# Altium PCB STM32WL_Relayout_RevA.PcbDoc (part 2 of 2)
Units mm, origin at the board's own origin, x right, y up, seen from the top; angles counter-clockwise.
Board outline 40.25 x 54.25 mm, 4 copper layers (Top Layer, Int1 (GND), Int2 (PWR), Bottom Layer), stack 1.535 mm thick; 114 components, 68 nets, 360 pads, 205 vias.
Unrouted connection lines stored in the file: 7.
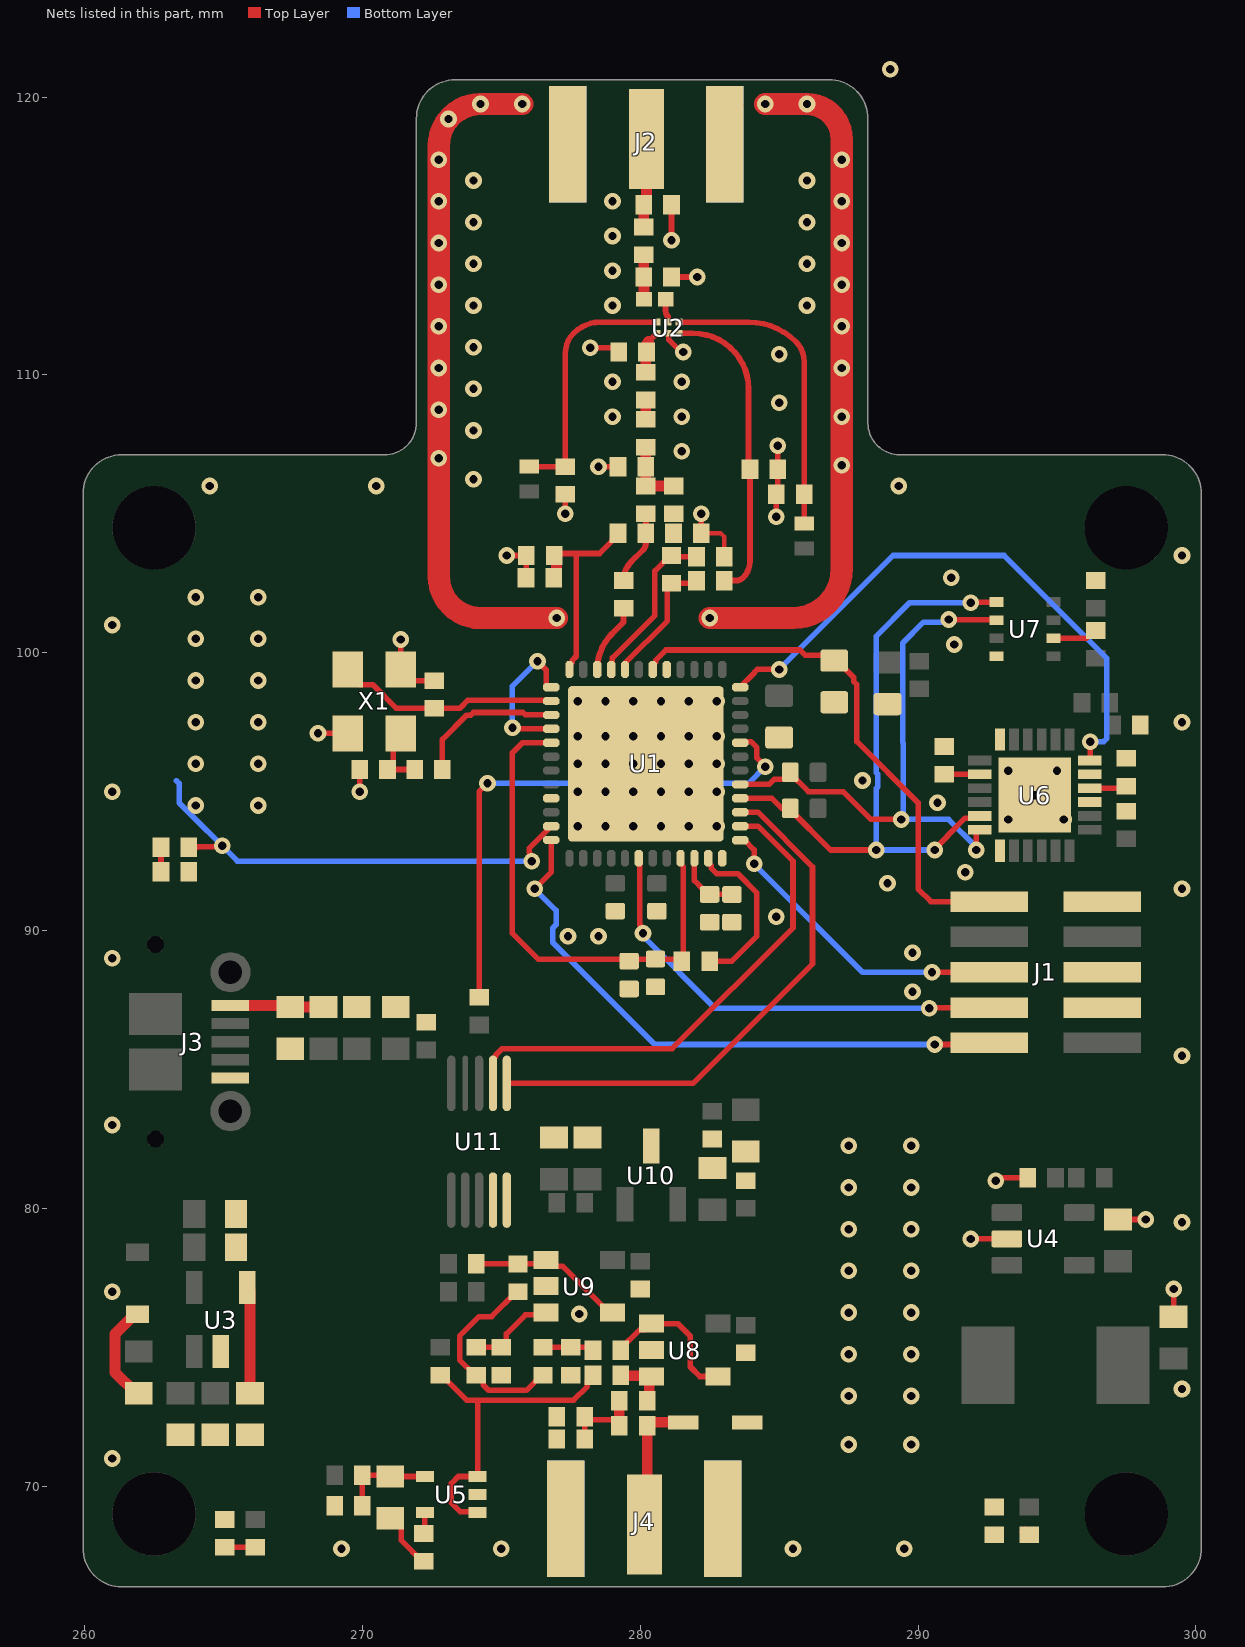
[diagram p4: the nets of this part, all layers, seen from the top]

## Via types
v1: diameter 0.6, hole 0.3, Top Layer to Bottom Layer, 205 vias

## Nets (pads, with @x,y where several pads share a name; then routed paths per layer and width w, separated by ;. In a path a pad name is that pad's centre, name@x,y a point inside that pad or via, vN(x,y) a via of type N, cw(c..) or ccw(c..) an arc to the next point about the centre after c; other vN are vias at no path point) (continued)
GND: C1.1 C2.1 C3.1 C5.1 C6.1 C7.1 C8.1 C9.1 C10.1 C11.1 C12.1 C13.1 C16.1 C17.1 C18.1 C20.1 C21.1 C23.1 C24.1 C25.1 C26.1 C27.1 C28.1 C29.1 C30.1 C31.1 C32.1 C33.1 C34.1 C35.1 C36.2 C37.1 C38.1 C39.1 C40.1 C41.1 C42.1 C43.1 C46.1 C47.2 C48.1 C49.1 C50.2 C52.1 C53.1 C54.1 C55.1 C56.1 C57.1 C58.1 C59.1 D5.1 J1.3 J1.5 J1.9 J2.2 J3.5 J4.2 R4.1 R5.1 R10.1 R12.1 R13.1 R15.1 R23.1 U1.48 U1.49 U2.2 U3.2 U4.2 U5.2 U6.1 U6.9 U6.11 U6.18 U6.25 U7.1 U7.7 U8.2 U9.2 U10.3 U11.4 U11.5 X1.2 X1.4 | length 83
  Top Layer w0.15: C16.1@282.2,104.3 282.9,104.3 282.962,104.238 283.025,104.175 C26.1@283.025,103.45
  Top Layer w0.2: v1(268.4,97.1) 268.402,97.098 X1.2@269.479,97.098 ; X1.2@269.1,96.719 X1.2@269.479,97.098 ; X1.2@269.2,97.376 X1.2@269.479,97.098 ; v1(269.9,95) 269.9,95.794 C21.1@269.904,95.798 ; C37.1@271,68.85 271.1,68.85 271.4,68.55 271.4,68.05 272.15,67.3 C36.2@272.2,67.3 ; v1@271.4,100.5 v1(271.379,100.479) X1.4@271.379,99.398 ; X1.4@271.781,99.8 X1.4@271.379,99.398 ; C20.1@272.676,98.9 C20.1@272.579,98.998 271.779,98.998 X1.4@271.379,99.398 ; v1(275.2,103.5) C11.1@275.9,103.5 275.9,102.709 C12.1@275.891,102.7 ; J2.2@276.825,116.675 277.4,117.25 J2.2@277.4,118.3 ; J2.2@276.825,119.4 277.4,118.825 J2.2@277.4,118.3 ; J2.2@276.925,117.825 J2.2@277.4,118.3 ; v1(277.3,105) C10.1@277.3,105.7 ; v1(278.2,110.975) 279.075,110.975 C18.1@279.225,110.825 ; v1(278.5,106.7) C17.1@279.2,106.7 ; U2.2@281,111.5 281.025,111.475 281.025,111.271 281.471,110.825 v1(281.55,110.825) ; C25.1@281.125,113.525 v1(282.05,113.525) ; v1(281.125,114.85) C24.1@281.125,116.125 ; C16.1@282.2,104.3 v1(282.2,105) ; J2.2@283.15,118.2 J2.2@283.05,118.3 ; J2.2@283.625,116.6 283.05,117.175 J2.2@283.05,118.3 ; J2.2@283.625,119.7 283.05,119.125 J2.2@283.05,118.3 ; v1(284.9,104.9) C13.1@284.9,105.7 284.95,105.75 C23.1@284.95,106.6 v1(284.95,107.45) ; v1(291.9,78.9) U4.2@293.2,78.9 ; v1(292.8,81) 292.9,81.1 R13.1@293.95,81.1 ; U7.7@294.875,100.525 296.075,100.525 296.35,100.8 C39.1@296.4,100.8 ; C34.1@297.2,79.6 v1(298.2,79.6) ; C35.1@299.2,76.1 v1(299.2,77.1)
  Top Layer w0.8: v1(275.75,119.75) v1(274.25,119.75) ccw(c274.25,118.25) 272.75,118.25 v1(272.75,117.75) v1(272.75,116.25) v1(272.75,114.75) v1(272.75,113.25) v1(272.75,111.75) v1(272.75,110.25) v1(272.75,108.75) v1(272.75,107) 272.75,102.75 ccw(c274.25,102.75) 274.25,101.25 v1(277,101.25) ; v1(282.5,101.25) 285.5,101.25 ccw(c285.5,103) 287.25,103 v1(287.25,106.75) v1(287.25,108.5) v1(287.25,110.25) v1(287.25,111.75) v1(287.25,113.25) v1(287.25,114.75) v1(287.25,116.25) v1(287.25,117.75) 287.25,118.5 ccw(c286,118.5) v1(286,119.75) v1(284.5,119.75)
  other v1: 269.25,67.75 275,67.75 285.5,67.75 289.5,67.75 261,71 287.5,71.5 289.75,71.5 287.5,73.25 289.75,73.25 299.5,73.5 287.5,74.75 289.75,74.75 277.8,76.2 287.5,76.25 289.75,76.25 261,77 287.5,77.75 289.75,77.75 287.5,79.25 289.75,79.25 299.5,79.5 299.5,79.5 287.5,80.75 289.75,80.75 287.5,82.25 289.75,82.25 261,83 299.5,85.5 289.8,87.8 261,89 289.8,89.2 277.4,89.8 278.5,89.8 284.9,90.5 299.5,91.5 288.9,91.7 291.7,92.1 277.75,93.75 278.75,93.75 279.75,93.75 280.75,93.75 281.75,93.75 282.75,93.75 293.25,94 295.25,94 266.25,94.5 290.7,94.6 294.2,94.875 261,95 277.75,95 278.75,95 279.75,95 280.75,95 281.75,95 282.75,95 288,95.4 293.25,95.75 295,95.75 264,96 266.25,96 277.75,96 278.75,96 279.75,96 280.75,96 281.75,96 282.75,96 277.75,97 278.75,97 279.75,97 280.75,97 281.75,97 282.75,97 264,97.5 266.25,97.5 299.5,97.5 299.5,97.5 277.75,98.25 278.75,98.25 279.75,98.25 280.75,98.25 281.75,98.25 282.75,98.25 264,99 266.25,99 291.3,100.3 264,100.5 266.25,100.5 261,101 264,102 266.25,102 291.2,102.7 299.5,103.5 264.5,106 270.5,106 289.3,106 274,106.25 281.5,107.25 274,108 279,108.5 281.5,108.5 285,109 274,109.5 279,109.75 281.5,109.75 285,110.75 274,111 274,112.5 279,112.5 286,112.5 279,113.75 274,114 286,114 279,115 274,115.5 286,115.5 279,116.25 274,117 286,117 273.101,119.214 289,121
IMU_CPOUT: C42.2 U6.20 | length 1.3
  Top Layer w0.2: C42.2@290.95,95.625 U6.20@292.225,95.625
IMU_INT: U1.12 U6.12 | length 20.9
  Top Layer w0.2: U1.12@283.598,98.761 284.1,99.262 284.1,99.283 284.217,99.4 v1(285,99.4) ; U6.12@296.175,96.125 296.2,96.15 v1(296.2,96.8)
  Bottom Layer w0.2: v1(285,99.4) 289.1,103.5 293.1,103.5 296.8,99.8 296.8,96.917 296.683,96.8 v1(296.2,96.8)
IMU_REGOUT: C40.2 U6.10 | length 1.4
  Top Layer w0.2: U6.10@296.175,95.125 297.425,95.125 C40.2@297.5,95.2
IN: D5.2 J4.1 R18.1 | length 5
  Top Layer w0.381: J4.1@280.15,68.625 280.25,68.725 R18.1@280.25,72.175 280.25,72.191 280.359,72.3 D5.2@281.55,72.3
IN_AA_Buf_IN: C48.2 R21.1 U9.3 | length 3.2
  Top Layer w0.2: R21.1@274.1,75 C48.2@275,75 275.183,75.183 275.183,75.483 275.867,76.167 276.517,76.167 U9.3@276.6,76.25
IN_AA_Buf_OUT: C44.1 R22.2 U9.1 U9.4 | length 5.7
  Top Layer w0.2: R22.2@274.1,78 C44.1@275.6,78 276.45,78 U9.1@276.6,78.15 276.825,77.925 277.2,77.925 278.875,76.25 U9.4@279,76.25
IN_Buf: C45.1 R17.1 U8.3 | length 1.9
  Top Layer w0.381: R17.1@279.3,74 279.325,73.975 280.225,73.975 280.325,73.875 280.325,73.15 C45.1@280.25,73.075
IN_RF: C45.2 C46.2 R18.2 R23.2 | length 3.4
  Top Layer w0.2: R23.2@278,71.7 C46.2@278,72.5 278.1,72.4 279.05,72.4 279.25,72.2 R18.2@279.25,72.175 ; C45.2@279.25,73.075 C45.2@279.35,72.975
  Top Layer w0.381: C46.2@278,72.5 C46.2@278.1,72.6 ; R18.2@279.25,72.175 C45.2@279.25,73.075
IP_Buf_Out: R19.2 U8.1 U8.4 | length 5.4
  Top Layer w0.2: R19.2@279.3,74.9 279.3,74.95 279.975,75.625 280.175,75.625 U8.1@280.4,75.85 281.35,75.85 281.8,75.4 281.8,74.3 282.15,73.95 U8.4@282.8,73.95
LDO_BYPASS: C33.2 U3.4 | length 3.8
  Top Layer w0.2: U3.4@265.85,77.15 U3.4@265.95,77.05
  Top Layer w0.4: C33.2@265.95,73.35 U3.4@265.95,77.05
LED_BUCK: D4.K R12.2 | length 0.2
  Top Layer w0.4: D4.K@293.85,68.35 293.95,68.25 D4.K@294,68.25
LED_LDO: D3.K R10.2 | length 1.1
  Top Layer w0.2: R10.2@265.05,67.8 D3.K@266.15,67.8
MCU_LED_A: D1.A U1.35 | length 17.3
  Top Layer w0.2: D1.A@263.75,93 264.05,93 264.075,93.025 264.925,93.025 v1(264.95,93.05) ; v1(276.1,92.5) 276.023,92.577 276.023,92.777 276,92.8 276,92.959 U1.35@276.802,93.761
  Bottom Layer w0.2: 263.3,95.4 263.4,95.3 263.4,94.6 265.5,92.5 v1(276.1,92.5)
  other v1: 264,94.5
MCU_LED_K: D1.K R5.2 | length 0.9
  Top Layer w0.2: R5.2@262.75,92.125 D1.K@262.75,93
MCU_PA: C11.2 C12.2 L2.2 U1.24 | length 8.7
  Top Layer w0.2: C11.2@276.9,103.5 277.091,103.309 277.091,102.9 C12.2@276.891,102.7 276.891,103.491 276.972,103.572 277.699,103.572 ; U1.24@277.452,99.399 277.452,99.565 277.552,99.665 277.552,99.727 277.699,99.874 277.699,103.572 ; L2.2@279.2,104.3 279,104.1 279,104.037 278.535,103.572 277.699,103.572
MCU_RF_OUT: L3.1 U1.22 | length 2.7
  Top Layer w0.214: U1.22@278.452,99.399 cw(c280.269,99.399) 278.984,100.684 279.4,101.1 L3.1@279.4,101.742
NetC6_2: C6.2 C7.2 U1.25 U1.28 U1.46 | length 7.5
  Top Layer w0.2: v1(275.4,97.3) 275.439,97.261 U1.28@276.802,97.261 ; v1(276.3,99.7) 276.618,99.382 276.618,98.811 276.668,98.761 U1.25@276.802,98.761 ; U1.46@281.952,92.601 281.952,91.8 C6.2@282.252,91.5 ; C6.2@282.4,91.3 C7.2@283.3,91.3
  Bottom Layer w0.2: v1(275.4,97.3) 275.4,98.8 v1(276.3,99.7)
NetC8_2: C8.2 C9.2 L1.1 U1.29 U1.45 | length 18
  Top Layer w0.2: U1.29@276.802,96.761 275.761,96.761 275.4,96.4 275.4,89.9 276.325,88.975 279.55,88.975 C9.2@280.55,88.975 281.425,88.975 L1.1@281.5,88.9 281.555,88.955 281.555,92.298
NetC10_2: C10.2 R6.2 U2.6 | length 9.3
  Top Layer w0.2: R6.2@276,106.7 C10.2@277.3,106.7 277.3,110.776 cw(c278.324,110.776) 277.6,111.5 cw(c278.566,110.534) 278.566,111.9 U2.6@280.6,111.9
NetC13_2: C13.2 R7.1 U2.4 | length 11
  Top Layer w0.2: U2.4@281.4,111.9 283.91,111.9 cw(c283.91,109.51) 285.6,111.2 cw(c284.876,110.476) 285.9,110.476 C13.2@285.9,105.7 R7.1@285.9,104.65
NetC14_1: C14.1 C16.2 L2.1 L3.2 L4.1 | length 2.7
  Top Layer w0.214: L3.2@279.4,102.6 cw(c280.366,102.6) 279.683,103.283 280.1,103.7 ccw(c279.859,103.941) 280.2,103.941 L2.1@280.2,104.3 L4.1@280.2,105
NetC14_2: C14.2 C15.1 C17.2 L4.2 | length 2.4
  Top Layer w0.39: C15.1@280.2,107.4 C17.2@280.2,106.7 L4.2@280.2,106 C14.2@281.2,106
NetC15_2: C15.2 L5.1 | length 0.7
  Top Layer w0.39: C15.2@280.2,108.4 L5.1@280.2,109.1
NetC18_2: C18.2 L5.2 U2.1 | length 1.6
  Top Layer w0.2: 280.3,111.2 U2.1@280.6,111.5
  Top Layer w0.39: L5.2@280.2,110.1 280.2,110.765 cw(c280.285,110.765) C18.2@280.225,110.825 280.225,111.019 cw(c280.481,111.019) 280.3,111.2
NetC19_2: C19.2 C23.2 U2.3 | length 11.2
  Top Layer w0.21: U2.3@281.4,111.5 281.9,111.5 cw(c281.9,109.5) 283.9,109.5 C23.2@283.9,106.6 ; C19.2@283.025,102.6 283.459,102.6 ccw(c283.459,102.941) 283.7,102.7 ccw(c283.096,103.304) 283.95,103.304 C23.2@283.95,106.6
NetC20_2: C20.2 U1.26 X1.1 | length 8.1
  Top Layer w0.2: X1.1@269.479,99.398 269.479,99.298 269.929,98.848 270.375,98.848 271.225,97.998 271.929,97.998 C20.2@272.579,97.998 273.503,97.998 273.799,98.294 276.768,98.294 U1.26@276.802,98.261
NetC21_2: C21.2 R8.1 X1.3 | length 2.5
  Top Layer w0.2: X1.3@271.379,97.098 271.104,96.823 271.104,95.998 C21.2@270.904,95.798 R8.1@271.879,95.798
NetC22_1: C22.1 C25.2 L7.2 | length 1.6
  Top Layer w0.39: L7.2@280.125,114.325 C25.2@280.125,113.525 cw(c280.101,113.501) 280.135,113.501 C22.1@280.135,112.725
NetC22_2: C22.2 U2.5 | length 0.8
  Top Layer w0.214: C22.2@280.915,112.725 280.915,112.305 ccw(c281.205,112.305) 281,112.1 U2.5@281,111.9
NetC24_2: C24.2 J2.1 L7.1 | length 3.3
  Top Layer w0.214: J2.1@280.125,118.4 J2.1@280.225,118.5
  Top Layer w0.39: L7.1@280.125,115.325 C24.2@280.125,116.125 ccw(c279.884,116.366) 280.225,116.366 J2.1@280.225,118.5
NetC36_1: C36.1 U5.5 | length 0.8
  Top Layer w0.2: C36.1@272.2,68.3 272.25,68.35 U5.5@272.25,69.05
NetC49_2: C49.2 R19.1 R20.2 | length 1.8
  Top Layer w0.2: R20.2@276.5,75 278.2,75 R19.1@278.3,74.9
NetD2_K: D2.K R9.1 | length 3.6
  Top Layer w0.4: D2.K@261.9,76.185 261.785,76.07 261.685,76.07 261.1,75.485 261.1,74.1 261.85,73.35 R9.1@261.95,73.35
NetL1_2: L1.2 U1.47 | length 6
  Top Layer w0.2: U1.47@282.452,92.601 282.452,92.435 282.552,92.335 282.552,92.248 282.75,92.05 283.51,92.05 284.2,91.36 284.2,89.8 283.3,88.9 L1.2@282.5,88.9
NetLabel74: C44.2 R20.1 R21.2 | length 7.3
  Top Layer w0.2: R21.2@274.1,74 274.05,74 273.5,74.55 273.5,75.404 274.198,76.102 274.652,76.102 275.55,77 C44.2@275.6,77 ; R21.2@274.141,74 274.15,74 274.35,73.8 274.35,73.646 274.546,73.45 275.9,73.45 276.45,74 R20.1@276.5,74
NetR8_2: R8.2 U1.27 | length 5.4
  Top Layer w0.2: R8.2@272.879,95.798 272.879,96.879 273.75,97.75 273.896,97.75 273.996,97.85 275.776,97.85 275.866,97.761 U1.27@276.802,97.761
NRST: J1.10 R4.2 U1.18 | length 19.4
  Top Layer w0.2: U1.18@280.452,99.399 280.452,99.565 280.552,99.665 280.552,99.727 280.924,100.1 285.75,100.1 285.933,99.917 286.783,99.917 R4.2@286.983,99.717 287.083,99.717 287.683,99.117 287.683,98.967 287.8,98.85 287.8,96.8 290,94.6 290,91.5 290.46,91.04 J1.10@292.565,91.04
RFI_RX_N: C26.2 L6.1 U1.21 | length 6.1
  Top Layer w0.2: U1.21@279,99.2 279,99.813 280.525,101.338 280.525,102.95 281.075,103.5 L6.1@281.125,103.5 ccw(c281.246,103.621) 281.246,103.45 C26.2@282.025,103.45
RFI_RX_P: C19.1 L6.2 U1.20 | length 5
  Top Layer w0.2: U1.20@279.454,99.399 279.454,99.625 280.979,101.15 280.979,102.354 L6.2@281.125,102.5 281.784,102.5 ccw(c281.784,102.841) C19.1@282.025,102.6 C19.1@282.225,102.85
SEN_SCL: R1.1 U1.4 U6.23 U7.4 | length 22.2
  Top Layer w0.2: U1.4@283.598,94.761 284.739,94.761 R1.1@285.1,94.4 ; R1.1@285.4,94.4 285.4,94.35 286.85,92.9 v1(288.5,92.9) ; v1(290.6,92.9) 290.6,92.937 291.077,93.413 291.077,93.43 291.696,94.05 292.15,94.05 U6.23@292.225,94.125 ; v1(291.9,101.8) 291.912,101.812 292.812,101.812 U7.4@292.825,101.825
  Bottom Layer w0.2: v1(290.6,92.9) v1(288.5,92.9) 288.5,95.122 288.55,95.172 288.55,95.628 288.5,95.678 288.5,100.6 289.7,101.8 v1(291.9,101.8)
SEN_SDA: R2.1 U1.5 U6.24 U7.3 | length 20.8
  Top Layer w0.2: U1.5@283.632,95.294 U1.5@283.598,95.261 284.639,95.261 284.828,95.45 285.2,95.45 285.4,95.65 286.05,95 287.3,95 288.3,94 v1(289.4,94) ; v1(291.1,101.2) 291.113,101.187 292.812,101.187 U7.3@292.825,101.175 ; v1(292.1,92.9) 292.1,93.55 292.175,93.625 U6.24@292.225,93.625
  Bottom Layer w0.2: v1(291.1,101.2) 291,101.1 290.2,101.1 289.45,100.35 289.45,96.772 289.475,96.747 289.475,94.075 v1(289.4,94) 291.1,94 292.1,93 v1(292.1,92.9)
SPI1_MISO: U1.2 U11.7 | length 18.5
  Top Layer w0.2: U11.7@274.7,84.5 274.7,85.377 274.8,85.477 274.8,85.516 275.034,85.75 281.15,85.75 285.5,90.1 285.5,92.5 284.239,93.761 U1.2@283.598,93.761
SPI1_NCS: U1.3 U11.6 | length 19.7
  Top Layer w0.2: U11.6@275.2,84.5 281.9,84.5 286.2,88.8 286.2,92.295 284.234,94.261 U1.3@283.598,94.261
SPI1_SCK: R26.1 U1.8 | length 19.6
  Top Layer w0.2: R26.1@274.2,87.6 274.2,95 v1(274.5,95.3) ; U1.8@283.6,96.7 283.7,96.8 283.983,96.8 284.2,96.583 284.2,96.217 284.5,95.917 v1(284.5,95.9)
  Bottom Layer w0.2: v1(274.5,95.3) 283.9,95.3 v1(284.5,95.9)
SWCLK: J1.4 U1.42 | length 16.4
  Top Layer w0.2: U1.42@279.952,92.601 279.985,92.568 279.985,90.217 280.023,90.179 280.023,89.977 v1(280.1,89.9) ; v1(290.4,87.2) 290.43,87.23 J1.4@292.565,87.23
  Bottom Layer w0.2: v1(280.1,89.9) 280.1,89.8 282.7,87.2 v1(290.4,87.2)
SWDIO: J1.2 U1.36 | length 21.6
  Top Layer w0.2: v1(276.2,91.5) 276.802,92.102 U1.36@276.802,93.261 ; v1(290.6,85.9) 292.505,85.9 J1.2@292.565,85.96
  Bottom Layer w0.2: v1(276.2,91.5) 276.974,90.726 276.974,90.211 276.85,90.087 276.85,89.572 280.522,85.9 281.622,85.9 v1(290.6,85.9)
SWO: J1.6 U1.1 | length 11.2
  Top Layer w0.2: U1.1@283.598,93.254 283.748,93.254 284.1,92.902 v1(284.1,92.4) ; v1(290.5,88.5) J1.6@292.565,88.5
  Bottom Layer w0.2: v1(284.1,92.4) 288,88.5 v1(290.5,88.5)
UART_RX: U1.33
UART_TX: U1.17
VCOM: R17.2 R24.2 U5.1 U5.3 | length 12
  Top Layer w0.2: R24.2@272.8,74 272.85,74 273.75,73.1 274.142,73.1 ; U5.1@274.15,69.05 274.125,69.075 273.525,69.075 273.2,69.4 273.2,70.1 273.45,70.35 U5.3@274.15,70.35 274.15,73.092 274.142,73.1 ; R17.2@278.3,74 278.1,73.8 278.1,73.596 277.604,73.1 274.142,73.1
VDC: C27.2 J3.1 L8.1 | length 3.4
  Top Layer w0.4: J3.1@265.25,87.3 267.35,87.3 C27.2@267.4,87.25 L8.1@268.6,87.25
VRef: C37.2 R14.1 R15.2 U5.4 | length 3.4
  Top Layer w0.2: R15.2@270,69.3 R14.1@270,70.4 270.95,70.4 C37.2@271,70.35 U5.4@272.25,70.35
pads on no net: J1.7 J1.8 J3.2 J3.3 J3.4 J3.6 J3.7 J3.8 J3.9 J3.10 J3.11 U1.6 U1.7 U1.9 U1.10 U1.13 U1.14 U1.15 U1.16 U1.23 U1.30 U1.31 U1.32 U1.38 U1.39 U1.40 U1.43 U6.2 U6.3 U6.4 U6.5 U6.6 U6.7 U6.14 U6.15 U6.16 U6.17 U6.19 U6.21 U6.22 U7.2
copper on no net:
  other v1: 289.8,86.5

## Polygon pours and split planes (outlines as drawn)
no net on Int1 (GND) "NONET_L02_P011" (solid, pour order 11): 259.943,67.77 259.943,103 259.943,105.73 cw(c261.34,105.73) 261.34,107.127 270.8,107.127 ccw(c270.8,108.27) 271.943,108.27 271.943,119.23 cw(c273.34,119.23) 273.34,120.627 286.8,120.627 cw(c286.8,119.23) 288.198,119.23 288.198,108.27 ccw(c289.34,108.27) 289.34,107.127 298.8,107.127 cw(c298.8,105.73) 300.198,105.73 300.198,104.9 300.198,67.77 cw(c298.8,67.77) 298.8,66.373 261.34,66.373 cw(c261.34,67.77)
GND on Int1 (GND) "GND_L02_P009" (solid, pour order 9): 259.943,67.77 259.943,103 259.943,105.73 cw(c261.34,105.73) 261.34,107.127 270.8,107.127 ccw(c270.8,108.27) 271.943,108.27 271.943,119.23 cw(c273.34,119.23) 273.34,120.627 286.8,120.627 cw(c286.8,119.23) 288.198,119.23 288.198,108.27 ccw(c289.34,108.27) 289.34,107.127 298.8,107.127 cw(c298.8,105.73) 300.198,105.73 300.198,104.9 300.198,67.77 cw(c298.8,67.77) 298.8,66.373 261.34,66.373 cw(c261.34,67.77)
+3V3 on Int2 (PWR) "+3V3_L03_P007" (solid, pour order 7): 259.943,67.77 259.943,103 259.943,105.73 cw(c261.34,105.73) 261.34,107.127 270.8,107.127 ccw(c270.8,108.27) 271.943,108.27 271.943,119.23 cw(c273.34,119.23) 273.34,120.627 286.8,120.627 cw(c286.8,119.23) 288.198,119.23 288.198,108.27 ccw(c289.34,108.27) 289.34,107.127 298.8,107.127 cw(c298.8,105.73) 300.198,105.73 300.198,104.9 300.198,67.77 cw(c298.8,67.77) 298.8,66.373 261.34,66.373 cw(c261.34,67.77)
GND on Bottom Layer "GND_L04_P010" (solid, pour order 10): 259.943,67.77 259.943,103 259.943,105.73 cw(c261.34,105.73) 261.34,107.127 270.8,107.127 ccw(c270.8,108.27) 271.943,108.27 271.943,119.23 cw(c273.34,119.23) 273.34,120.627 286.8,120.627 cw(c286.8,119.23) 288.198,119.23 288.198,108.27 ccw(c289.34,108.27) 289.34,107.127 298.8,107.127 cw(c298.8,105.73) 300.198,105.73 300.198,104.9 300.198,67.77 cw(c298.8,67.77) 298.8,66.373 261.34,66.373 cw(c261.34,67.77)

## Silkscreen, mask and mechanical layers (free items; w line width, h text height)
Top Overlay:
  text "Rev 1.0" at 292.75,44.05 h1
  text "LoRa Sens" at 292.55,40.35 h1.52
Top Solder:
  lines w0.9: 275.75,119.744 274.25,119.744 ccw(c274.25,118.244) 272.75,118.244 272.75,117.744 272.75,116.244 272.75,114.744 272.75,113.244 272.75,111.744 272.75,110.244 272.75,108.744 272.75,106.994 272.75,102.744 ccw(c274.25,102.744) 274.25,101.244 277,101.244 ; 282.5,101.244 285.5,101.244 ccw(c285.5,102.994) 287.25,102.994 287.25,106.744 287.25,108.494 287.25,110.244 287.25,111.744 287.25,113.244 287.25,114.744 287.25,116.244 287.25,117.744 287.25,118.494 ccw(c286,118.494) 286,119.744 284.5,119.744
Mechanical 1:
  lines w0.1: 244.175,88.425 306.625,88.425 ; 259.943,67.77 ccw(c261.34,67.77) 261.34,66.373 ; 259.943,67.77 ccw(c261.34,67.77) 261.34,66.373 ; 259.943,67.77 259.943,103 ; 259.943,67.77 259.943,103 ; 259.943,103 259.943,105.73 ; 259.943,103 259.943,105.73 ; 259.943,105.73 cw(c261.34,105.73) 261.34,107.127 ; 259.943,105.73 cw(c261.34,105.73) 261.34,107.127 ; 261.34,66.373 261.34,66.373 ; 261.34,66.373 261.34,66.373 ; 261.34,66.373 298.8,66.373 ; 261.34,66.373 298.8,66.373 ; 261.34,107.127 270.8,107.127 ; 261.34,107.127 270.8,107.127 ; 270.8,107.127 ccw(c270.8,108.27) 271.943,108.27 ; 270.8,107.127 ccw(c270.8,108.27) 271.943,108.27 ; 271.943,108.27 271.943,119.23 ; 271.943,108.27 271.943,119.23 ; 271.943,119.23 cw(c273.34,119.23) 273.34,120.627 ; 271.943,119.23 cw(c273.34,119.23) 273.34,120.627 ; 273.34,120.627 286.8,120.627 ; 273.34,120.627 286.8,120.627 ; 286.8,120.627 cw(c286.8,119.23) 288.198,119.23 ; 286.8,120.627 cw(c286.8,119.23) 288.198,119.23 ; 288.198,108.27 ccw(c289.34,108.27) 289.34,107.127 ; 288.198,108.27 ccw(c289.34,108.27) 289.34,107.127 ; 288.198,108.27 288.198,119.23 ; 288.198,108.27 288.198,119.23 ; 289.34,107.127 298.8,107.127 ; 289.34,107.127 298.8,107.127 ; 298.8,66.373 ccw(c298.8,67.77) 300.198,67.77 ; 298.8,66.373 ccw(c298.8,67.77) 300.198,67.77 ; 298.8,107.127 cw(c298.8,105.73) 300.198,105.73 ; 298.8,107.127 cw(c298.8,105.73) 300.198,105.73 ; 300.198,67.77 300.198,104.9 ; 300.198,67.77 300.198,104.9 ; 300.198,104.9 300.198,105.73 ; 300.198,104.9 300.198,105.73
  lines w0.254: 260,67.77 ccw(c261.27,67.77) 261.27,66.5 ; 260,105.73 cw(c261.27,105.73) 261.27,107 ; 270.739,107 ccw(c270.739,108.116) 271.855,108.116 ; 272,119.23 cw(c273.27,119.23) 273.27,120.5 ; 272.07,119.13 271.925,108.116 cw(c270.809,108.116) 270.809,107 261.34,107 ccw(c261.34,105.73) 260.07,105.73 260.07,103 260.07,67.77 ccw(c261.34,67.77) 261.34,66.5 298.8,66.5 ccw(c298.8,67.77) 300.07,67.77 300.07,104.9 300.07,105.73 ccw(c298.8,105.73) 298.8,107 289.34,107 cw(c289.34,108.27) 288.07,108.27 288.07,119.23 ccw(c286.8,119.23) 286.8,120.5 273.34,120.5 ccw(c273.34,119.23) 272.07,119.23 ; 286.73,120.5 cw(c286.73,119.23) 288,119.23 ; 288,108.27 ccw(c289.27,108.27) 289.27,107 ; 298.73,66.5 ccw(c298.73,67.77) 300,67.77 ; 298.73,107 cw(c298.73,105.73) 300,105.73
Mechanical 3:
  lines w0.1: 260.07,67.77 260.083,67.589 260.122,67.412 260.185,67.242 260.272,67.083 260.381,66.938 260.509,66.81 260.654,66.702 260.813,66.615 260.983,66.551 261.16,66.513 261.34,66.5 298.8,66.5 298.981,66.513 299.158,66.551 299.328,66.615 299.487,66.702 299.632,66.81 299.76,66.938 299.869,67.083 299.956,67.242 300.019,67.412 300.057,67.589 300.07,67.77 300.07,105.73 300.057,105.911 300.019,106.088 299.956,106.258 299.869,106.417 299.76,106.562 299.632,106.69 299.487,106.798 299.328,106.885 299.158,106.949 298.981,106.987 298.8,107 289.34,107 289.16,107.013 288.983,107.051 288.813,107.115 288.654,107.202 288.509,107.31 288.381,107.438 288.272,107.583 288.185,107.742 288.122,107.912 288.083,108.089 288.07,108.27 288.07,119.23 288.057,119.411 288.019,119.588 287.956,119.758 287.869,119.917 287.76,120.062 287.632,120.19 287.487,120.298 287.328,120.385 287.158,120.449 286.981,120.487 286.8,120.5 273.34,120.5 273.16,120.487 272.983,120.449 272.813,120.385 272.654,120.298 272.509,120.19 272.381,120.062 272.272,119.917 272.185,119.758 272.122,119.588 272.083,119.411 272.07,119.23 272.07,108.27 272.057,108.089 272.019,107.912 271.956,107.742 271.869,107.583 271.76,107.438 271.632,107.31 271.487,107.202 271.328,107.115 271.158,107.051 270.981,107.013 270.8,107 261.34,107 261.16,106.987 260.983,106.949 260.813,106.885 260.654,106.798 260.509,106.69 260.381,106.562 260.272,106.417 260.185,106.258 260.122,106.088 260.083,105.911 260.07,105.73 260.07,67.77
Mechanical 4:
  circle w0.1: c262.92,93.298 r0.3
  circle w0.1: c265.37,67.7 r0.3
  circle w0.1: c269.372,67.7 r0.3
  circle w0.1: c273.374,67.7 r0.3
  circle w0.1: c277.376,67.7 r0.3
  circle w0.1: c281.378,67.7 r0.3
  circle w0.1: c289.382,67.7 r0.3
  circle w0.1: c293.384,67.7 r0.3
  circle w0.1: c298.87,74.251 r0.3
  circle w0.1: c298.87,82.255 r0.3
  circle w0.1: c298.87,90.259 r0.3
  circle w0.1: c267.158,105.8 r0.3
  circle w0.1: c261.27,99.65 r0.3
  circle w0.1: c261.27,87.644 r0.3
  circle w0.1: c261.27,83.642 r0.3
  circle w0.1: c262,80.5 r0.3
  circle w0.1: c261.27,75.638 r0.3
  circle w0.1: c261.27,71.636 r0.3
  lines w0.1: 260.82,75.638 261.72,75.638 ; 260.82,99.65 261.72,99.65 ; 261,64 261,109 ; 261.27,71.186 261.27,72.086 ; 261.27,75.188 261.27,76.088 ; 261.27,79.19 261.27,80.09 ; 261.27,83.192 261.27,84.092 ; 261.27,87.194 261.27,88.094 ; 261.27,99.2 261.27,100.1 ; 262.47,93.298 263.37,93.298 ; 262.92,92.848 262.92,93.748 ; 264.92,67.7 265.82,67.7 ; 265.37,67.25 265.37,68.15 ; 266.708,105.8 267.608,105.8 ; 267.158,105.35 267.158,106.25 ; 268.922,67.7 269.822,67.7 ; 269.372,67.25 269.372,68.15 ; 272.924,67.7 273.824,67.7 ; 273.1,99.9 276.7,99.9 ; 273.374,67.25 273.374,68.15 ; 276.926,67.7 277.826,67.7 ; 277.376,67.25 277.376,68.15 ; 280.928,67.7 281.828,67.7 ; 281.378,67.25 281.378,68.15 ; 284.93,67.7 285.83,67.7 ; 288.932,67.7 289.832,67.7 ; 292.934,67.7 293.834,67.7 ; 293.92,105.8 294.82,105.8 ; 298.42,74.251 299.32,74.251 ; 298.42,98.263 299.32,98.263 ; 298.87,73.801 298.87,74.701 ; 298.87,81.805 298.87,82.705 ; 298.87,85.807 298.87,86.707 ; 298.87,89.809 298.87,90.709 ; 298.87,97.813 298.87,98.713 ; 298.87,101.814 298.87,102.714 ; 299.5,64.05 299.5,107.55
Mechanical 6:
  drawing of 225 lines, arcs and shapes, not listed
  text "RF GND GUARD GUIDE - APPROX. 0.8mm COPPER WIDTH, 0.6/0.3mm GND VIAS, ~1.75mm PITCH" at 260.5,122 h0.8
  text "BOTTOM LEFT OPEN AROUND RF FEED / MATCHING NETWORK" at 268,98.8 h0.6
Mechanical 7:
  circle w0.1: c278.2,112 r0.3
  circle w0.1: c283.5,112.1 r0.3
  circle w0.1: c275.4,101.9 r0.3
  circle w0.1: c273.379,103.479 r0.3
  circle w0.1: c275.2,103.5 r0.3
  circle w0.1: c276.3,99.7 r0.3
  circle w0.1: c276,104.6 r0.3
  circle w0.1: c282.6,84.3 r0.3
  circle w0.1: c272.2,84.4 r0.3
  circle w0.1: c271.1,84.8 r0.3
  circle w0.1: c268.6,84.6 r0.3
  circle w0.1: c271.3,83.2 r0.3
  circle w0.1: c291.9,78.9 r0.3
  circle w0.1: c292.8,81 r0.3
  circle w0.1: c298.2,81.1 r0.3
  circle w0.1: c299.2,77.1 r0.3
  circle w0.1: c298.2,79.6 r0.3
  circle w0.1: c270.4,100.1 r0.3
  circle w0.1: c271.9,98 r0.3
  circle w0.1: c290.8,79.8 r0.3
  circle w0.1: c277.8,79.2 r0.3
  circle w0.1: c287,103.9 r0.3
  circle w0.1: c282.6,78.1 r0.3
  circle w0.1: c267.6,80.8 r0.3
  circle w0.1: c285.8,98.143 r0.3
  circle w0.1: c290.6,85.9 r0.3
  circle w0.1: c290.4,87.2 r0.3
  circle w0.1: c280.1,89.9 r0.3
  circle w0.1: c284.1,92.4 r0.3
  circle w0.1: c290.5,88.5 r0.3
  circle w0.1: c275.4,97.3 r0.3
  circle w0.1: c287.1,95.7 r0.3
  circle w0.1: c287.1,94.4 r0.3
  circle w0.1: c292.1,92.9 r0.3
  circle w0.1: c290.6,92.9 r0.3
  circle w0.1: c290.7,94.6 r0.3
  circle w0.1: c288.9,91.7 r0.3
  circle w0.1: c291.7,92.1 r0.3
  circle w0.1: c289.4,94 r0.3
  circle w0.1: c288.5,92.9 r0.3
  circle w0.1: c291.9,101.8 r0.3
  circle w0.1: c291.1,101.2 r0.3
  circle w0.1: c291.2,102.7 r0.3
  circle w0.1: c291.3,100.3 r0.3
  circle w0.1: c289.8,89.2 r0.3
  circle w0.1: c289.8,87.8 r0.3
  circle w0.1: c289.8,86.5 r0.3
  circle w0.1: c277.4,89.8 r0.3
  circle w0.1: c278.5,89.8 r0.3
  circle w0.1: c284.9,90.5 r0.3
  circle w0.1: c272.7,79 r0.3
  circle w0.1: c281.3,78.8 r0.3
  circle w0.1: c274.5,95.3 r0.3
  circle w0.1: c284.5,95.9 r0.3
  circle w0.1: c277.7,91.7 r0.3
  circle w0.1: c280.95,89.818 r0.3
  circle w0.1: c276,94.2 r0.3
  circle w0.1: c285,99.4 r0.3
  circle w0.1: c296.2,96.8 r0.3
  circle w0.1: c295.7,99.2 r0.3
  circle w0.1: c298.5,93.3 r0.3
  circle w0.1: c276.1,92.5 r0.3
  circle w0.1: c263.3,95.4 r0.3
  circle w0.1: c291.35,99.2 r0.3
  circle w0.1: c288,95.4 r0.3
  circle w0.1: c277.8,76.2 r0.3
  circle w0.1: c276.2,91.5 r0.3
  circle w0.1: c277.7,90.7 r0.3
Mechanical 8:
  circle w0.1: c262.5,69 r1.5
  circle w0.1: c262.5,104.5 r1.5
  circle w0.1: c297.5,104.5 r1.5
  circle w0.1: c297.5,69 r1.5

## Dimensions
300,67.77 to 259.943,103 on Mechanical 8
286.73,120.5 to 298.73,66.5 on Mechanical 8
260,67.77 to 300,67.77 on Mechanical 8
282.925,69 to 300,67.77 on Mechanical 8
277.275,69 to 260,67.77 on Mechanical 8
300,117.5 to 288,119.1 on Mechanical 8
260,116.7 to 272,116.9 on Mechanical 8
300,116.2 to 283.05,118.3 on Mechanical 8

## Text inside footprints (layer, text, board x,y; h text height)
D1: Top 3D Body "+" at 265.133,92.492 h0.5 r180
D3: Top 3D Body "+" at 266.658,70.183 h0.5 r270
D4: Top 3D Body "+" at 294.508,70.633 h0.5 r270
J2: Mechanical 10 "Edge of PCB" at 282.225,121.225 h0.8 r180
J4: Mechanical 10 "Edge of PCB" at 278.15,65.9 h0.8